# Altium PCB Pcb Layout.PcbDoc
Units mm, origin at the board's own origin, x right, y up, seen from the top; angles counter-clockwise.
Board outline 32.1 x 63.3 mm, 2 copper layers (Top Layer, Bottom Layer); 13 components, 11 nets, 59 pads, 0 vias.
Unrouted connection lines stored in the file: 28.
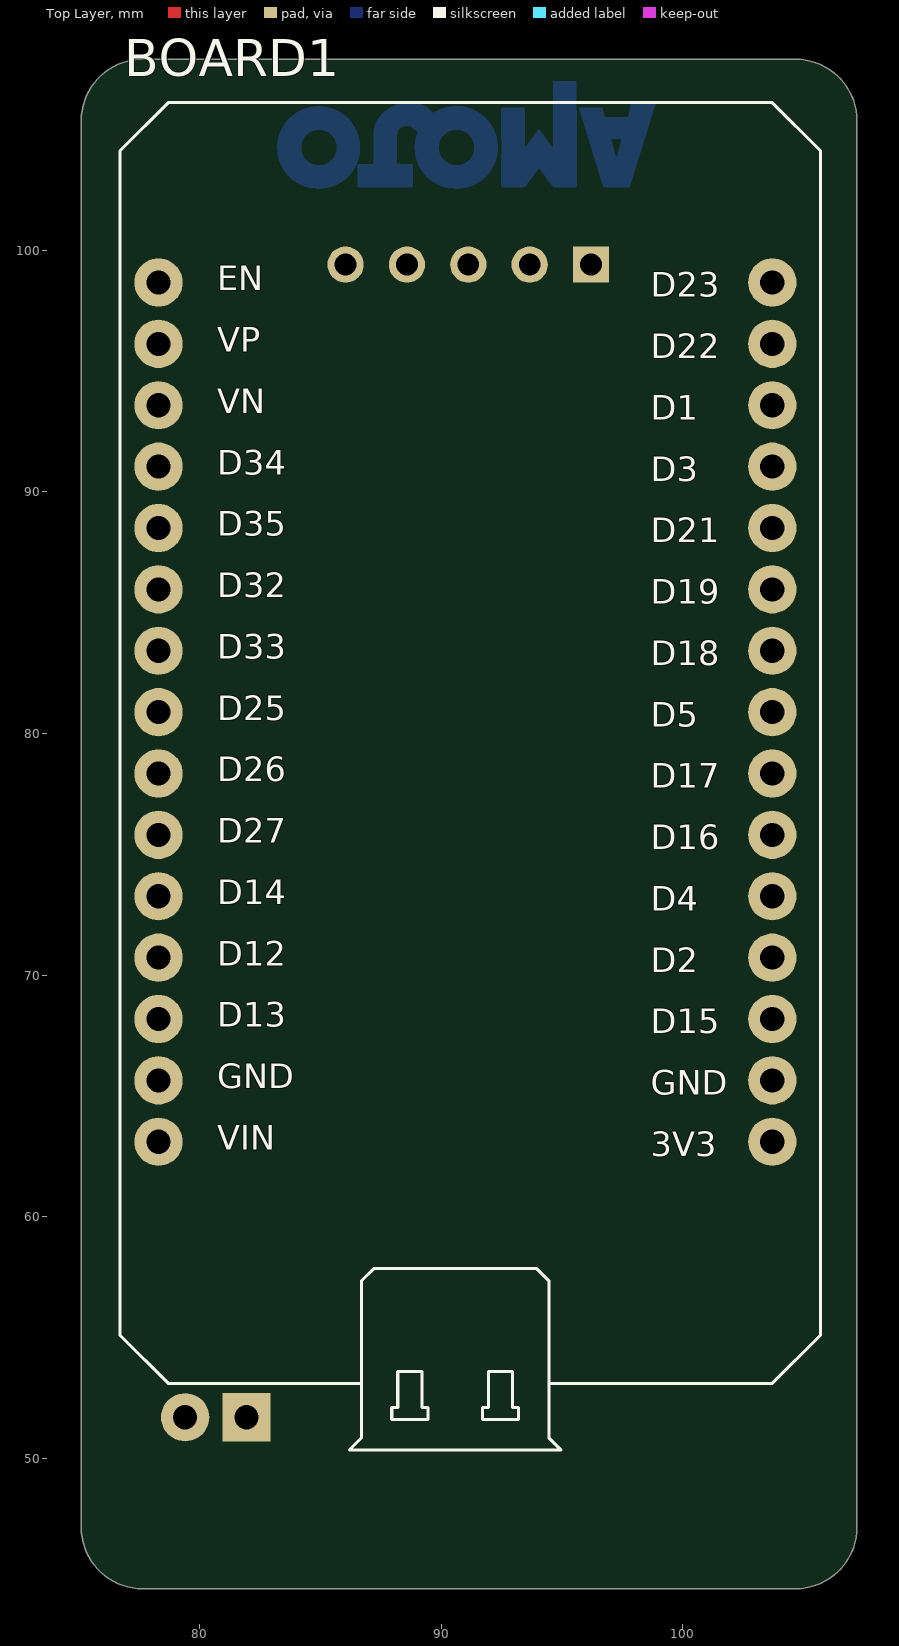
[diagram p0: Top Layer view]
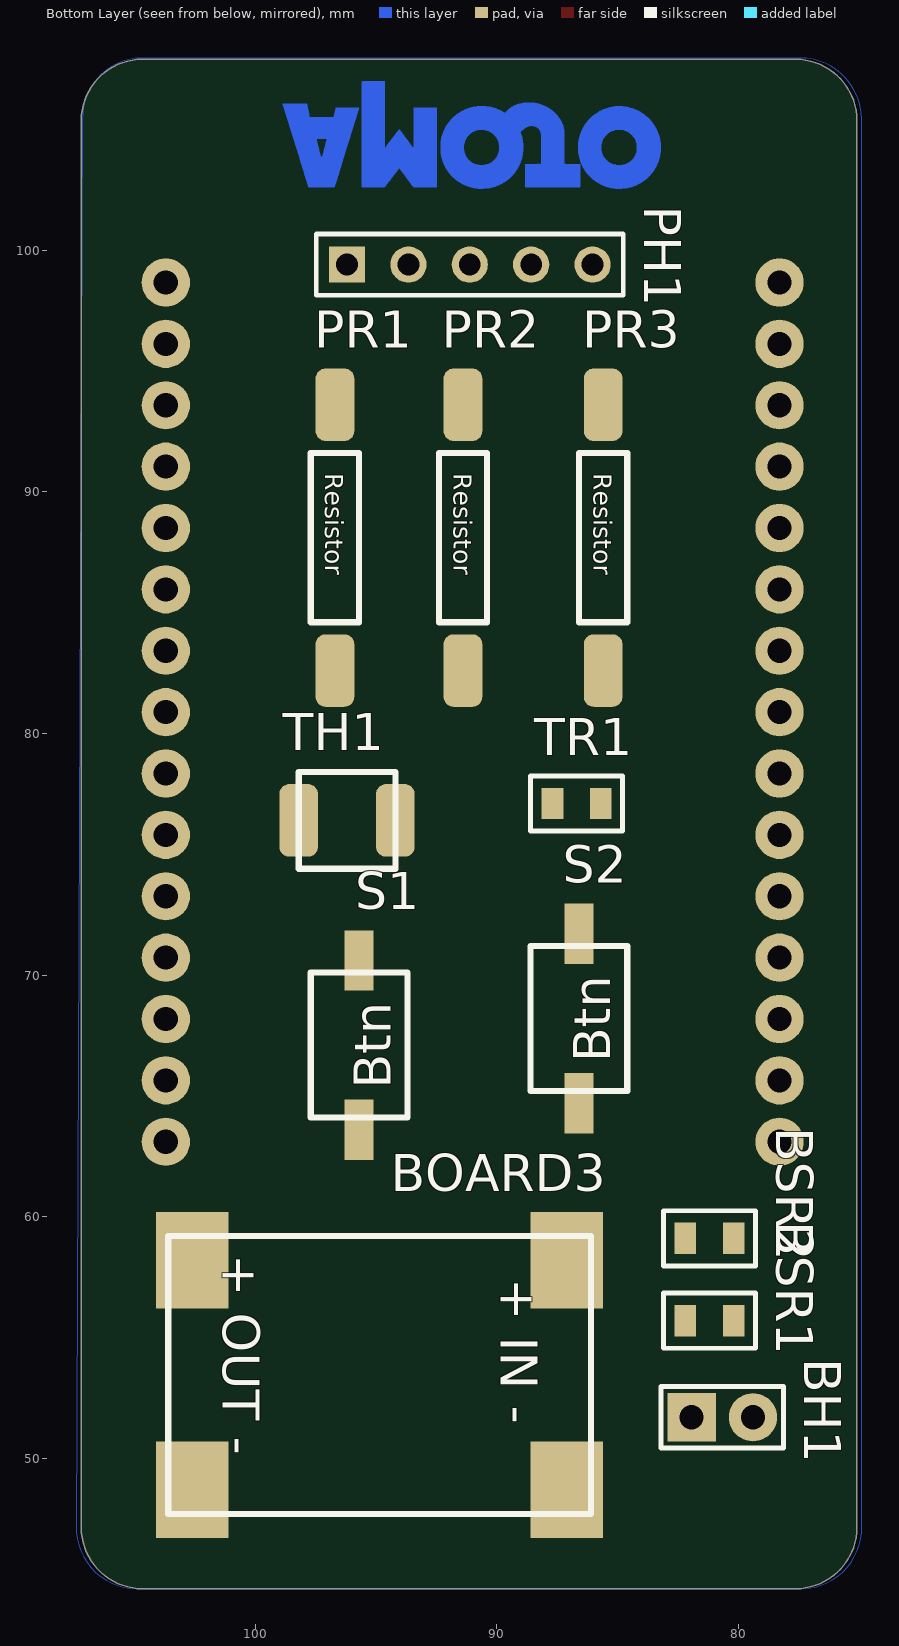
[diagram p1: Bottom Layer view, seen from below]

## Layer stack, top to bottom
Top Solder: solder mask 0.0102, Solder Resist, Dk 3.5
Top Layer: signal copper 0.0356
Dielectric 1: dielectric 0.32, FR-4, Dk 4.8
Bottom Layer: signal copper 0.0356
Bottom Solder: solder mask 0.0102, Solder Resist, Dk 3.5

## Board outline
104.66,44.6 ccw(c104.66,47.14) 107.2,47.14 107.2,105.36 ccw(c104.66,105.36) 104.66,107.9 77.64,107.9 ccw(c77.64,105.36) 75.1,105.36 75.1,47.14 ccw(c77.64,47.14) 77.64,44.6

## Design rules (kind name [scope] priority, off if disabled: settings)
Clearance [All] p1: gap=0.6 ignorepadtopadclearanceinfootprint=FALSE except(0: Arc-Hole Track-Hole SMDPad-Hole THPad-Hole Via-Hole Fill-Hole Poly-Hole Region-Hole Text-Hole; 0.254: Arc-Arc Arc-Track Track-Track SMDPad-SMDPad THPad-THPad THPad-Text; 0.3: Arc-Text Track-Text SMDPad-Text Via-Text Fill-Text Poly-Text Region-Text Text-Text; 0.4: Arc-Via Track-Via SMDPad-Via THPad-Via Via-Via; 0.5: Arc-SMDPad Arc-THPad Arc-Fill Arc-Poly Arc-Region Track-SMDPad Track-THPad Track-Fill Track-Poly Track-Region SMDPad-THPad)
PlaneClearance [All] p1: clearance=1.2
PlaneConnect [All] p1: planeconnectstyle=Relief reliefexpansion=0.508 reliefentries=4 reliefconductorwidth=0.5 reliefairgap=0.254
PolygonConnect [All] p1: connectstyle=Relief reliefconductorwidth=0.5 reliefentries=4 polygonreliefangle="90 Angle" airgapwidth=0.3
RoomDefinition "Schematic Diagram" [InComponentClass('Schematic Diagram')] p1: confinementstyle=ConfineIn formatcopy=TRUE lockcomponents=FALSE outline 115.8,47.2 228.4,47.2 228.4,106.2 115.8,106.2
RoutingLayers [All] p1: top layer_v5=FALSE bottom layer_v5=TRUE
RoutingVias [All] p1: holewidth=0.711 width=1.27 viastyle="Through Hole" minholewidth=0.711 minwidth=1.27 maxholewidth=0.711 maxwidth=1.27
SolderMaskExpansion [All] p1: expansion=0.102 istentingtop=FALSE
Width [All] p1: maxlimit=0.5 minlimit=0.2 preferedwidth=0.35
27 further rules are at their usual default settings.

## Components (designator, comment, footprint, x,y, rotation, side; value= is the part's Value field where it differs from the comment)
BH1 "" HDR1X2 81.94,51.7 r180 bottom
BOARD1 "ESP32DEVKITV1" ESP32-DEVKITV1 103.7,63.1 r90 top
BOARD3 "Step Down Buck DC DC 3A" "Step Down Buck DC DC 3A" 102.6,58.2 r270 bottom
BSR1 "Resistor_1" "Smd Resistor" 81.2,55.7 r180 bottom value=30k
BSR2 "" "Smd Resistor" 81.2,59.1 r180 bottom value=100k
PH1 "Panel+Servo" HDR1X5 96.2,99.4 r180 bottom
PR1 "" "1/4W SMD Resistor" 96.7,94.1 r270 bottom value=10
PR2 "" "1/4W SMD Resistor" 91.4,94.1 r270 bottom value=10
PR3 "" "1/4W SMD Resistor" 85.6,94.1 r270 bottom value=10
S1 "Push Button Normally Opened" "Smd Push Button (Extended Legs)" 95.7,63.6 r90 bottom
S2 "Push Button Normally Opened" "Smd Push Button (Extended Legs)" 86.6,64.7 r90 bottom
TH1 "Thermistor" "Smd Thermistor Terminal" 94.2,76.4 r0 bottom
TR1 "Resistor_3" "Smd Resistor" 86.7,77.1 r0 bottom value=10k

## Footprints (in the part's own frame and the unit in brackets; to place one, negate y for a bottom-side part, rotate by r counter-clockwise, add the part's x,y. Pads: shape width x height; smd on the part's side, far side on the other; paste and mask are expansions set on the pad)
"1/4W SMD Resistor" [mm] "Footprint to use standard THC 1/4W Resistor"
  rrect50% 3x1.6 smd: 1(0.5,0) 2(11.5,0)
  silkscreen extent 2.5,-1 9.5,1
ESP32-DEVKITV1 [mm]
  round 2 hole 1: 3V3(0,0) D1(30.48,0) D2(7.62,0) D3(27.94,0) D4(10.16,0) D5(17.78,0) D12(7.62,25.4) D13(5.08,25.4) D14(10.16,25.4) D15(5.08,0) D16(12.7,0) D17(15.24,0) D18(20.32,0) D19(22.86,0) D21(25.4,0) D22(33.02,0) D23(35.56,0) D25(17.78,25.4) D26(15.24,25.4) D27(12.7,25.4) D32(22.86,25.4) D33(20.32,25.4) D34(27.94,25.4) D35(25.4,25.4) EN(35.56,25.4) GND(2.54,25.4) GND@1(2.54,0) VIN(0,25.4) VN(30.48,25.4) VP(33.02,25.4)
  silkscreen extent -12.75,-2 43,27
HDR1X2 [mm]
  rect 2x2 hole 1: 1(0,0)
  round 2 hole 1: 2(2.54,0)
  silkscreen extent -1.27,-1.27 3.81,1.27
HDR1X5 [mm] "Connector; Header; 5 Position"
  rect 1.5x1.5 hole 0.9: 1(0,0)
  round 1.5 hole 0.9: 2(2.54,0) 3(5.08,0) 4(7.62,0) 5(10.16,0)
  silkscreen extent -1.27,-1.27 11.43,1.27
"Smd Push Button (Extended Legs)" [mm] "Footprint for smd push button with extended legs"
  rect 2.5x1.2 smd: 1(0,0) 2(7,0)
  silkscreen extent 0.5,-2 6.5,2
"Smd Resistor" [mm]
  rect 0.9x1.3 smd: 1(-1,0) 2(1,0)
  silkscreen extent -1.91,-1.14 1.91,1.14
"Smd Thermistor Terminal" [mm]
  rrect50% 1.6x3 smd: 1(0,0) 2(4,0)
  silkscreen extent 0,-2 4,2
"Step Down Buck DC DC 3A" [mm] "Buck converter DC-DC 3A max"
  rect 4x3 smd: 1(0,15.5) 2(9.5,15.5) 3(0,0) 4(9.5,0)
  silkscreen extent -1,-1 10.5,16.5

## Part data
BH1: library part Battery, "Constant Voltage Source", DC Magnitude=13v, SimulationGenericComponent=True
BOARD1: "Dual core, Wi-Fi: 2.4 GHz up to 150 Mbits/s,BLE (Bluetooth Low Energy) and legacy Bluetooth, 32 bits, Up to 240 MHz", Package=Package, Availability=Unavailable, Check_prices=https://www.snapeda.com/parts/ESP32%20DEVKIT%20V1/Do%20it/view-part/5659245/?ref=eda, MF="Do it", MP="ESP32 DEVKIT V1", Price=None, SnapEDA_Link=https://www.snapeda.com/parts/ESP32%20DEVKIT%20V1/Do%20it/view-part/5659245/?ref=snap
BSR1 TR1: "Resistor", SimulationGenericComponent=True, TC1=0, TC2=0
BSR2: library part Resistor_2, "Resistor", SimulationGenericComponent=True, TC1=0, TC2=0
PH1: library part "Header 5", "Header, 5-Pin", LatestRevisionDate=17-Jul-2002, LatestRevisionNote="Re-released for DXP Platform.", Publisher="Altium Limited"
PR1 PR2 PR3: library part Resistor, "Resistor", SimulationGenericComponent=True, TC1=0, TC2=0
S1 S2: library part "Push Button NO", closed=0, Rclosed=1m, Ropen=1Meg, SimulationGenericComponent=True

## Nets (pads, with @x,y where several pads share a name; then routed paths per layer and width w, separated by ;. In a path a pad name is that pad's centre, name@x,y a point inside that pad or via, vN(x,y) a via of type N, cw(c..) or ccw(c..) an arc to the next point about the centre after c; other vN are vias at no path point)
3v3: BOARD1.3V3 TH1.2
5v: BOARD1.VIN BOARD3.3 PH1.1
GND: BH1.1 BOARD1.GND BOARD1.GND@1 BOARD3.2 BOARD3.4 BSR1.1 PH1.2 PH1.5 PR1.1 PR2.1 S1.1 S2.1 TR1.1
NetBH1_2: BH1.2 BOARD3.1 BSR2.2
NetBOARD1_D32: BOARD1.D32 S2.2
NetBOARD1_D33: BOARD1.D33 PH1.3
NetBOARD1_D34: BOARD1.D34 BSR1.2 BSR2.1
NetBOARD1_D35: BOARD1.D35 S1.2
NetBOARD1_VN: BOARD1.VN TH1.1 TR1.2
NetBOARD1_VP: BOARD1.VP PH1.4 PR3.1
NetPR1_2: PR1.2 PR2.2 PR3.2
pads on no net: BOARD1.D1 BOARD1.D2 BOARD1.D3 BOARD1.D4 BOARD1.D5 BOARD1.D12 BOARD1.D13 BOARD1.D14 BOARD1.D15 BOARD1.D16 BOARD1.D17 BOARD1.D18 BOARD1.D19 BOARD1.D21 BOARD1.D22 BOARD1.D23 BOARD1.D25 BOARD1.D26 BOARD1.D27 BOARD1.EN

## Polygon pours and split planes (outlines as drawn)
GND on Bottom Layer "GND_L02_P000" (solid, pour order 0): 104.71,107.95 cw(c104.66,105.46) 107.15,105.41 107.4,46.94 cw(c104.86,47.14) 104.66,44.6 77.64,44.6 cw(c77.44,47.14) 74.9,46.94 74.9,105.41 cw(c77.44,105.41) 77.44,107.95

## Other copper
Bottom Layer:
  region: 946 vertices and 1 holes, not listed, extent 95.708,102.608 98.866,106.064
  region: 1935 vertices and 1 holes, not listed, extent 86.548,102.541 92.329,106.1
  region: 1466 vertices and 1 holes, not listed, extent 83.22,102.541 86.635,105.951
  region: 931 vertices and 0 holes, not listed, extent 92.488,102.608 95.6,106.99

## Text inside footprints (layer, text, board x,y; h text height)
BOARD1: Top Overlay "EN" at 80.73,98.33 h1.02; Top Overlay "VP" at 80.73,95.79 h1.02; Top Overlay "VN" at 80.73,93.25 h1.02; Top Overlay "D34" at 80.73,90.71 h1.02; Top Overlay "D35" at 80.73,88.17 h1.02; Top Overlay "D32" at 80.73,85.63 h1.02; Top Overlay "D33" at 80.73,83.09 h1.02; Top Overlay "D25" at 80.73,80.55 h1.02; Top Overlay "D26" at 80.73,78.01 h1.02; Top Overlay "D27" at 80.73,75.47 h1.02; Top Overlay "D14" at 80.73,72.93 h1.02; Top Overlay "D12" at 80.73,70.39 h1.02; Top Overlay "D13" at 80.73,67.85 h1.02; Top Overlay "GND" at 80.73,65.31 h1.02; Top Overlay "VIN" at 80.73,62.77 h1.02; Top Overlay "D23" at 98.66,98.06 h1.02; Top Overlay "D22" at 98.66,95.52 h1.02; Top Overlay "D1" at 98.66,92.98 h1.02; Top Overlay "D3" at 98.66,90.44 h1.02; Top Overlay "D21" at 98.66,87.9 h1.02; Top Overlay "D19" at 98.66,85.36 h1.02; Top Overlay "D18" at 98.66,82.82 h1.02; Top Overlay "D5" at 98.66,80.28 h1.02; Top Overlay "D17" at 98.66,77.74 h1.02; Top Overlay "D16" at 98.66,75.2 h1.02; Top Overlay "D4" at 98.66,72.66 h1.02; Top Overlay "D2" at 98.66,70.12 h1.02; Top Overlay "D15" at 98.66,67.58 h1.02; Top Overlay "GND" at 98.66,65.04 h1.02; Top Overlay "3V3" at 98.66,62.5 h1.02; Mechanical 13 "ESP32-DEVKITV1" at 108.24,89.46 h1.27 r90
BOARD3: Bottom Overlay "+ IN -" at 89.846,57.446 h1.52 r90; Bottom Overlay "+ OUT -" at 101.346,58.446 h1.52 r90
PR1: Bottom Overlay "Resistor" at 97.093,90.758 h0.75 r90
PR2: Bottom Overlay "Resistor" at 91.793,90.758 h0.75 r90
PR3: Bottom Overlay "Resistor" at 85.993,90.758 h0.75 r90
S1: Bottom Overlay "Btn" at 94.4,65.3 h1.52 r270
S2: Bottom Overlay "Btn" at 85.3,66.4 h1.52 r270